# EAGLE board acq06 (EAGLE 9.5.1)
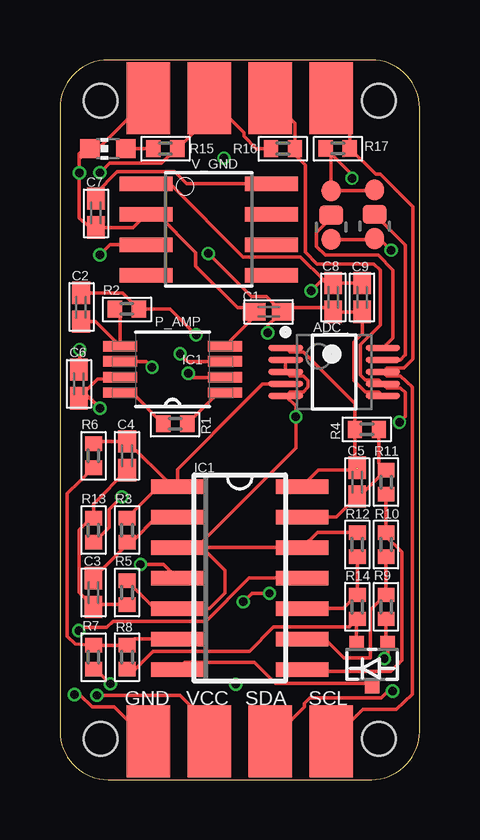
[diagram p0: board, top side]
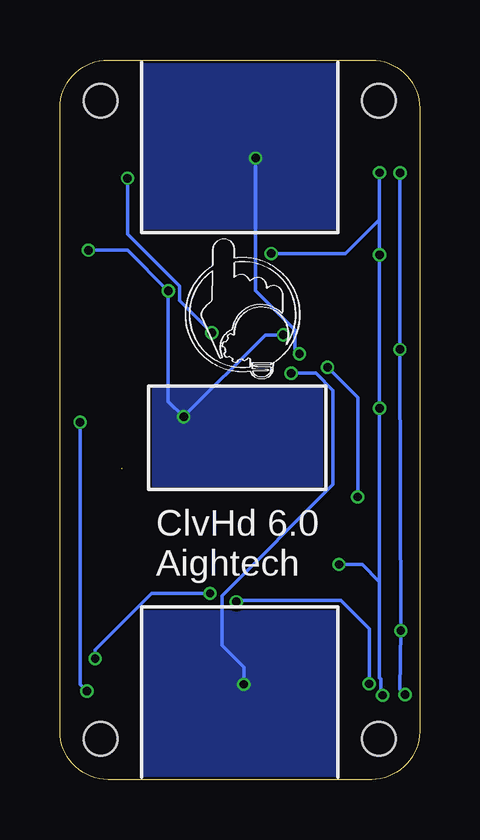
[diagram p1: board, bottom side, seen from below]

Size 15 x 30 mm. Coordinates in mm from the lower left corner, seen from the top.
Outline: 2,0 13,0 arc90 15,2 15,28 arc90 13,30 2,30 arc90 0,28 0,2 arc90 2,0
Copper layers (1*16): Top 0.035559375mm / dielectric 0.17018125mm / Bottom 0.035559375mm
Design rules "jlcpcb-4-layer *": minimum track width 5mil, minimum drill 0.2mm, track to track 0.126490625mm, track to pad 0.126490625mm, pad to pad 0.126490625mm, via to via 0.126490625mm, smd to smd 0mil, copper to edge 0.1mm, drill to drill 5mil, minimum pad ring 4mil, minimum via ring 4mil, stop-mask expansion 3mil, vias tented up to drill 100mil, thermal gap 10mil
Holes 1.4 mm at 1.7,1.7 13.3,1.7 13.3,28.3 1.7,28.3

## Footprints (pad centres in the part's own frame; a part is rotated, then mirrored left to right if it is on the bottom)
MICROCHIP_MCP3427-E-UN_0 = smd 1.45 x 0.25: 1 -2.025,1; 2 -2.025,0.5; 3 -2.025,0; 4 -2.025,-0.5; 5 -2.025,-1; 6 2.025,-1; 7 2.025,-0.5; 8 2.025,0; 9 2.025,0.5; 10 2.025,1
C0402K = smd 0.925 x 0.74: 1 -0.6,0; 2 0.6,0
SOT323 = smd 0.6 x 0.55: 1 -0.65,-0.925; 2 0.65,-0.925; 3 0,0.925
SO14 = smd 0.6 x 2.2: 1 -3.81,-2.6; 2 -2.54,-2.6; 3 -1.27,-2.6; 4 0,-2.6; 5 1.27,-2.6; 6 2.54,-2.6; 7 3.81,-2.6; 8 3.81,2.6; 9 2.54,2.6; 10 1.27,2.6; 11 0,2.6; 12 -1.27,2.6; 13 -2.54,2.6; 14 -3.81,2.6
C0R-JMP = smd 0.8 x 0.889: 1 0,1.016; 3 0,-1.016 | smd 1 x 0.8: 2 0,0
CHIP-LED0603 = smd 0.8 x 0.8: A 0,-0.75; C 0,0.75
SOP65P490X110-8N = smd 1.422 x 0.432: 1 -2.184,0.965; 2 -2.184,0.33; 3 -2.184,-0.33; 4 -2.184,-0.965; 5 2.184,-0.965; 6 2.184,-0.33; 7 2.184,0.33; 8 2.184,0.965
R0402 = smd 0.6 x 0.7: 1 -0.5,0; 2 0.5,0
SO-8 = smd 0.61 x 2.21: 1 -1.905,-2.616; 2 -0.635,-2.616; 3 0.635,-2.616; 4 1.905,-2.616; 5 1.905,2.616; 6 0.635,2.616; 7 -0.635,2.616; 8 -1.905,2.616
009176002 = smd 1.8 x 3: 1 -1.27,0; 2 1.27,0

## Placement (x,y rotation side)
ADC  MICROCHIP_MCP3427-E-UNMICROCHIP_MCP3427-E-UN_0_0  [MICROCHIP_MCP3427-E-UN_0]  11.44,16.99 0 top
C1  0.1nF  [C0402K]  8.7,19.5 180 top
C2  1nF  [C0402K]  0.88,19.69 270 top
C3  0.1nF  [C0402K]  1.4,7.8 270 top
C4  0.1nF  [C0402K]  2.8,13.5 270 top
C5  0.1nF  [C0402K]  12.4,12.4 90 top
C6  0.1nF  [C0402K]  0.79,16.5 90 top
C7  0.1nF  [C0402K]  1.5,23.62 270 top
C8  0.1nF  [C0402K]  11.4,20.1 270 top
C9  0.1nF  [C0402K]  12.6,20.1 270 top
D3  HSMS-285C  [SOT323]  13.02,4.8 180 top
IC1  LMV324M  [SO14]  7.5,8.4 270 top
JMP1  0R-JUMPC  [C0R-JMP]  13.12,23.57 180 top
JMP2  0R-JUMPC  [C0R-JMP]  11.31,23.53 180 top
LED2  [CHIP-LED0603]  2,26.3 90 top
P_AMP  INA326EA/250  [SOP65P490X110-8N]  4.7,17.1 180 top
R1  100k  [R0402]  4.81,14.83 180 top
R2  100k  [R0402]  2.79,19.62 180 top
R3  100k  [R0402]  2.8,10.4 90 top
R4  100k  [R0402]  12.8,14.6 180 top
R5  100k  [R0402]  2.8,7.8 90 top
R6  100k  [R0402]  1.4,13.5 270 top
R7  100k  [R0402]  1.4,5.1 270 top
R8  100k  [R0402]  2.8,5.1 270 top
R9  100k  [R0402]  13.6,7.2 90 top
R10  100k  [R0402]  13.6,9.8 90 top
R11  100k  [R0402]  13.6,12.4 90 top
R12  100k  [R0402]  12.4,9.8 270 top
R13  100k  [R0402]  1.4,10.4 90 top
R14  100k  [R0402]  12.4,7.2 270 top
R15  [R0402]  4.4,26.3 180 top
R16  100k  [R0402]  9.3,26.3 0 top
R17  100k  [R0402]  11.59,26.31 0 top
V_GND  TLE2426CD  [SO-8]  6.21,22.93 270 top
X1  009176002  [009176002]  4.96,1.6 0 top
X2  009176002  [009176002]  10.04,1.6 0 top
X4  009176002  [009176002]  4.96,28.4 0 top
X6  009176002  [009176002]  10.04,28.4 0 top

## Library data of the parts
ADC = UN; CIIVA_IDS: 1029210; COMPONENT_LINK_1_DESCRIPTION: Manufacturer URL; COMPONENT_LINK_1_URL: http://www.microchip.com/; COMPONENT_LINK_3_DESCRIPTION: Package Specification; COMPONENT_LINK_3_URL: http://www.microchip.com/stellent/groups/techpub_sg/documents/packagingspec/en012702.pdf; DATASHEET: http://ww1.microchip.com/downloads/en/DeviceDoc/22226a.pdf; DATASHEET_VERSION: revA, Dec-2009; FOOTPRINT_VARIANT_NAME_0: Level C; FOOTPRINT_VARIANT_NAME_1: Level B; FOOTPRINT_VARIANT_NAME_2: Level A; IMPORTED: yes; IMPORTED_FROM: vault; IMPORT_TS: 1521848675; MF: Microchip; MPN: MCP3427-E/UN; PACKAGE: MSOP-UN10; PACKAGE_DESCRIPTION: 10-Lead Plastic Micro Small Outline Package (UN) [MSOP]; PACKAGE_VERSION: revBB, Aug-2009; PIN_0_0_2_INSIDE_EDGE: clock; PREFIX: U; RELEASE_DATE: 1331949051; VAULT_GUID: A68823D5-815D-456C-A47E-4251F2B2754A; VAULT_REVISION: E4767321-FC88-4F77-9C9C-64A9666F4DA4
C1-C9 = rcl; SPICEPREFIX: C
D3 = avago
IC1 = linear; SPICEPREFIX: J
JMP1 JMP2 = jump-0r-smd
LED2 = led
P_AMP = INA326EA_250; DESCRIPTION: Precision, Low Drift, CMOS Instrumentation Amplifier 8-VSSOP -40 to 85; DIGI-KEY_PART_NUMBER: 296-15312-1-ND; DIGI-KEY_PURCHASE_URL: https://www.digikey.com/product-detail/en/texas-instruments/INA326EA-250/296-15312-1-ND/568254?utm_source=snapeda&utm_medium=aggregator&utm_campaign=symbol; MF: Texas Instruments; MP: INA326EA/250; PACKAGE: MSOP-8 Texas Instruments
R1-R17 = rcl; SPICEPREFIX: R
V_GND = tle2426
X1 X2 X4 X6 = con-avxPerso; MPN: 009176002001006; OC_FARNELL: 1582834; OC_NEWARK: 66M1960

## Nets
GNDA: ADC.2 ADC.3 ADC.5 C2.1 C8.1 C9.1 IC1.3 IC1.5 IC1.12 JMP1.1 JMP2.1 R2.1 R5.2 R12.1 V_GND.1
INM: P_AMP.2
INP: P_AMP.3
N$1: P_AMP.1 R1.1
N$2: P_AMP.8 R1.2
N$4: C2.2 P_AMP.5 R2.2
N$6: C3.1 IC1.2 R3.1
N$7: C3.2 C4.2 R5.1 R13.2
N$8: C5.1 IC1.13 R4.1 R11.2
N$9: P_AMP.6 R13.1
N$10: IC1.6 R6.2 R7.1 R8.1
N$11: D3.2 R8.2 R14.2
N$12: IC1.9 R9.2 R10.1
N$13: D3.3 IC1.7
N$14: D3.1 R7.2 R9.1
N$15: IC1.8 R10.2 R11.1
N$16: ADC.1 C5.2 IC1.14 R4.2
N$17: ADC.7 R16.2 X2.1 X6.1
N$18: IC1.10 R12.2 R14.1
N$23: ADC.4 C4.1 IC1.1 R3.2 R6.1
N$54: LED2.A R15.2
N$55: C7.1 V_GND.8
N$56: ADC.8 R17.2 X2.2 X6.2
N$57: ADC.9 JMP1.2
N$58: ADC.10 JMP2.2
V+: ADC.6 C1.1 C6.1 C8.2 C9.2 IC1.4 JMP1.3 JMP2.3 P_AMP.7 R15.1 R16.1 R17.1 V_GND.3 X1.2 X4.2
V-: C1.2 C6.2 C7.2 IC1.11 LED2.C P_AMP.4 V_GND.2 X1.1 X4.1

## Tracks (layer width: path | path; a pad name or v marks a point on that pad's centre or on a via)
GNDA  (via drill 0.35)
  Top 0.152: JMP2.1 13.08,22.51 JMP1.1 13.33,22.55 v13.81,22.07 | C9.1 C8.1 | C8.1 11.55,20.8 11.53,20.82 11.01,20.82 10.04,21.79 7.64,21.79 4.59,24.84 V_GND.1 | ADC.2 ADC.3 9.59,16.82 10.15,16.82 10.34,16.63 10.34,16.35 10.15,16.16 9.59,16.16 ADC.5 9.84,15.56 v9.84,15.13 9.84,13.82 5.68,9.66 5.29,9.66 5.28,9.67 IC1.3 | IC1.3 IC1.12 10.73,10.3 R12.1 | IC1.3 5.93,9.67 6.89,8.71 6.89,7.79 6.23,7.13 IC1.5 3.95,7.13 2.8,8.28 R5.2 | C2.1 2.62,20.29 R2.1 4.6,19.62 v5.68,18.54 | v10.48,20.37 10.91,20.8 C8.1
  Bottom 0.152: v5.68,18.54 6.43,18.54 v9.84,15.13 10.48,15.77 v10.48,20.37 12.18,22.07 v13.81,22.07
  pour Bottom (no thermals): 4.1,16.27 11.1,16.27 11.1,12.27 4.1,12.27
INM  (via drill 0.35)
  Top 0.152: P_AMP.2 5.52,16.77 v5.35,16.94
  Bottom 0.152: v5.35,16.94 4.33,16.94 3.61,16.22 3.61,12.3 8.25,7.66 8.25,5.59 7.33,4.67 v7.33,3.97
  pour Bottom (no thermals): 3.5,7 3.5,0 11.5,0 11.5,7
INP  (via drill 0.35)
  Top 0.152: P_AMP.3 5.33,17.43 v5.01,17.75
  Bottom 0.152: v5.01,17.75 5.2,17.94 5.2,18.74 6.84,20.38 v6.84,25.91
  pour Bottom (no thermals): 3.5,23 3.5,30 11.5,30 11.5,23
N$1
  Top 0.152: R1.1 6.62,16.14 P_AMP.1
N$2
  Top 0.152: P_AMP.8 3,16.14 R1.2
N$4
  Top 0.152: C2.2 1.49,19.09 P_AMP.5 2.52,19.39 R2.2
N$6
  Top 0.152: C3.1 2.8,9.8 R3.1 3,9.9 4.04,10.94 IC1.2
N$7
  Top 0.152: R5.1 1.5,7.3 C3.2 0.8,7.8 0.8,10.4 1.3,10.9 R13.2 1.4,11.5 C4.2
N$8
  Top 0.152: IC1.13 11.54,10.94 C5.1 12.48,11.8 R11.2 13.3,13.2 R4.1
N$9  (via drill 0.35)
  Top 0.152: v2.58,11.78 2.05,11.25 2.05,10.52 1.44,9.9 R13.1 | P_AMP.6 3.6,17.43 v3.84,17.19
  Bottom 0.152: v3.84,17.19 2.58,15.93 v2.58,11.78
N$10
  Top 0.152: IC1.6 3.1,5.86 R8.1 R7.1 0.63,5.65 0.3,5.96 0.3,11.92 R6.2
N$11
  Top 0.152: D3.2 12.37,6.67 R14.2 12.06,6.36 8.92,6.36 7.91,5.35 3.88,5.35 3.08,4.56 R8.2
N$12
  Top 0.152: R10.1 R9.2 13.58,7.7 12.95,7.07 12.95,5.08 11.84,5.08 11.05,5.86 IC1.9
N$13
  Top 0.152: IC1.7 5.2,4.89 8.11,4.89 8.99,4.02 12.88,4.02 D3.3
N$14  (via drill 0.35)
  Top 0.152: R9.1 13.6,5.79 D3.1 13.67,5.18 v13.53,5.04 | R7.2 1.47,4.62 v2.1,3.99 | v7.65,7.41 8,7.76 v8.74,7.76
  Bottom 0.152: v2.1,3.99 2.1,6.29 3.28,7.47 7.59,7.47 v7.65,7.41 | v13.53,5.04 13.53,5.41 11.18,7.76 v8.74,7.76
N$15
  Top 0.152: R11.1 R10.2 13.6,10.14 14.25,9.48 14.25,4.97 13.79,4.51 10.18,4.51 IC1.8
N$16  (1 unrouted)
  Top 0.152: IC1.14 10.79,12.9 12.35,12.9 12.4,12.95 | ADC.1 9.59,17.82 10.15,17.82 12.3,15.67 R4.2 12.3,13.1 C5.2
N$17  (via drill 0.35)
  Top 0.152: X6.1 9.8,27.37 R16.2 9.8,26.05 10.23,25.61 10.23,21.99 10.72,21.5 13.1,21.5 13.36,21.24 13.36,18.95 12.54,18.13 12.54,16.85 12.73,16.66 13.29,16.66 ADC.7 13.64,16.32 14.2,16.32 14.4,16.13 14.4,15.13 v14.16,14.9 | X2.1 10.21,3.04 10.21,3.18 10.42,3.4 13.4,3.4 13.7,3.69 v13.88,3.69
  Bottom 0.152: v13.88,3.69 14.16,3.97 v14.16,14.9
N$18
  Top 0.152: IC1.10 11.83,7.13 R14.1 R12.2
N$23
  Top 0.152: R3.2 4.11,12.21 4.69,12.21 | ADC.4 8.44,16.49 7.8,15.85 7.8,15.84 4.9,12.94 IC1.1 4.69,12.21 | R6.1 1.5,14.1 C4.1 4.69,12.21
N$54
  Top 0.152: LED2.A R15.2
N$55
  Top 0.152: V_GND.8 5.29,24.84 4.78,25.34 2.39,25.34 1.5,24.45 C7.1
N$56
  Top 0.152: X6.2 12.09,27.62 R17.2 13.17,25.23 13.37,25.23 14.72,23.88 14.72,17.53 14.35,17.16 13.64,17.16 ADC.8 13.64,16.82 14.2,16.82 14.7,16.36 14.7,3.54 14.03,2.92 12.63,2.92 X2.2
N$57
  Top 0.152: JMP1.2 14.41,22.28 14.41,17.69 14.39,17.69 14.2,17.49 ADC.9
N$58
  Top 0.152: JMP2.2 11.31,23.41 10.71,22.81 10.71,22.22 11.07,21.86 13.27,21.86 13.88,21.25 13.88,18.41 ADC.10
V+  (via drill 0.35)
  Top 0.152: JMP1.3 13.08,24.55 JMP2.3 11.31,26.09 R17.1 12.18,25.22 v12.18,25.07 | C1.1 9.38,19.67 11.38,19.67 C8.2 C9.2 12.62,18.6 12.26,18.24 12.26,16.63 12.73,16.16 13.29,16.16 ADC.6 | X1.2 5.61,2.22 5.61,2.9 5.01,3.51 v1.54,3.51 | v1.67,25.3 2.07,25.7 4.23,25.7 4.84,26.3 R15.1 6.23,27.63 X4.2 7.67,26.96 7.67,26.82 8.18,26.3 R16.1 | v1.67,21.88 2.08,22.3 V_GND.3 | P_AMP.7 2.45,16.7 1.57,16.7 1.01,16.14 v1.67,15.48 1.25,15.9 C6.1 | v3.36,8.97 4.33,8.97 IC1.4 | v8.67,18.63 8.67,18.96 C1.1 | v6.19,21.93 7.99,20.13 8.62,20.13 9.19,19.56 C1.1
  Bottom 0.152: v1.67,25.3 1.67,23.35 | 1.67,23.35 v1.67,21.88 v1.67,15.48 1.67,8.25 | 1.67,8.25 1.67,4.24 1.62,4.19 1.62,3.59 v1.54,3.51 | v3.36,8.97 2.39,8.97 1.67,8.25 | v8.67,18.63 10,19.96 10,20.57 12.18,22.75 v12.18,25.07 | v6.19,21.93 3.09,21.93 1.67,23.35
V-  (via drill 0.35)
  Top 0.152: LED2.C 1.59,26.3 X4.1 | LED2.C 0.98,26.3 0.8,26.1 0.8,23.4 1.29,23.02 C7.2 3.05,23.02 V_GND.2 4.07,23.57 5.67,21.96 5.67,21.41 7.41,19.67 7.96,19.67 C1.2 8.07,19.25 P_AMP.4 | v0.6,3.54 0.83,3.54 1.34,3.03 2.26,3.03 X1.1 | v0.81,25.29 0.81,25.86 LED2.C | v0.78,6.21 0.99,6.33 1.95,6.33 2.22,6.6 6.09,6.6 7.89,8.4 IC1.11 | v0.82,17.93 0.82,17.13 C6.2
  Bottom 0.152: v0.81,25.29 v0.82,25.28 v0.82,17.93 v0.78,6.21 0.82,3.76 v0.6,3.54

## Text on the board
bPlace: ClvHd 6.0 / Aightech
tNames: IC1 | GND VCC SDA SCL